# Altium PCB PCB3.PcbDoc
Units mil, origin at the board's own origin, x right, y up, seen from the top; angles counter-clockwise.
Board outline 2952.76 x 2952.76 mil, 4 copper layers (Top Copper, Signal Layer 1, Signal Layer 2, Bottom Copper), stack 61.811 mil thick; 36 components, 31 nets, 190 pads, 97 vias.
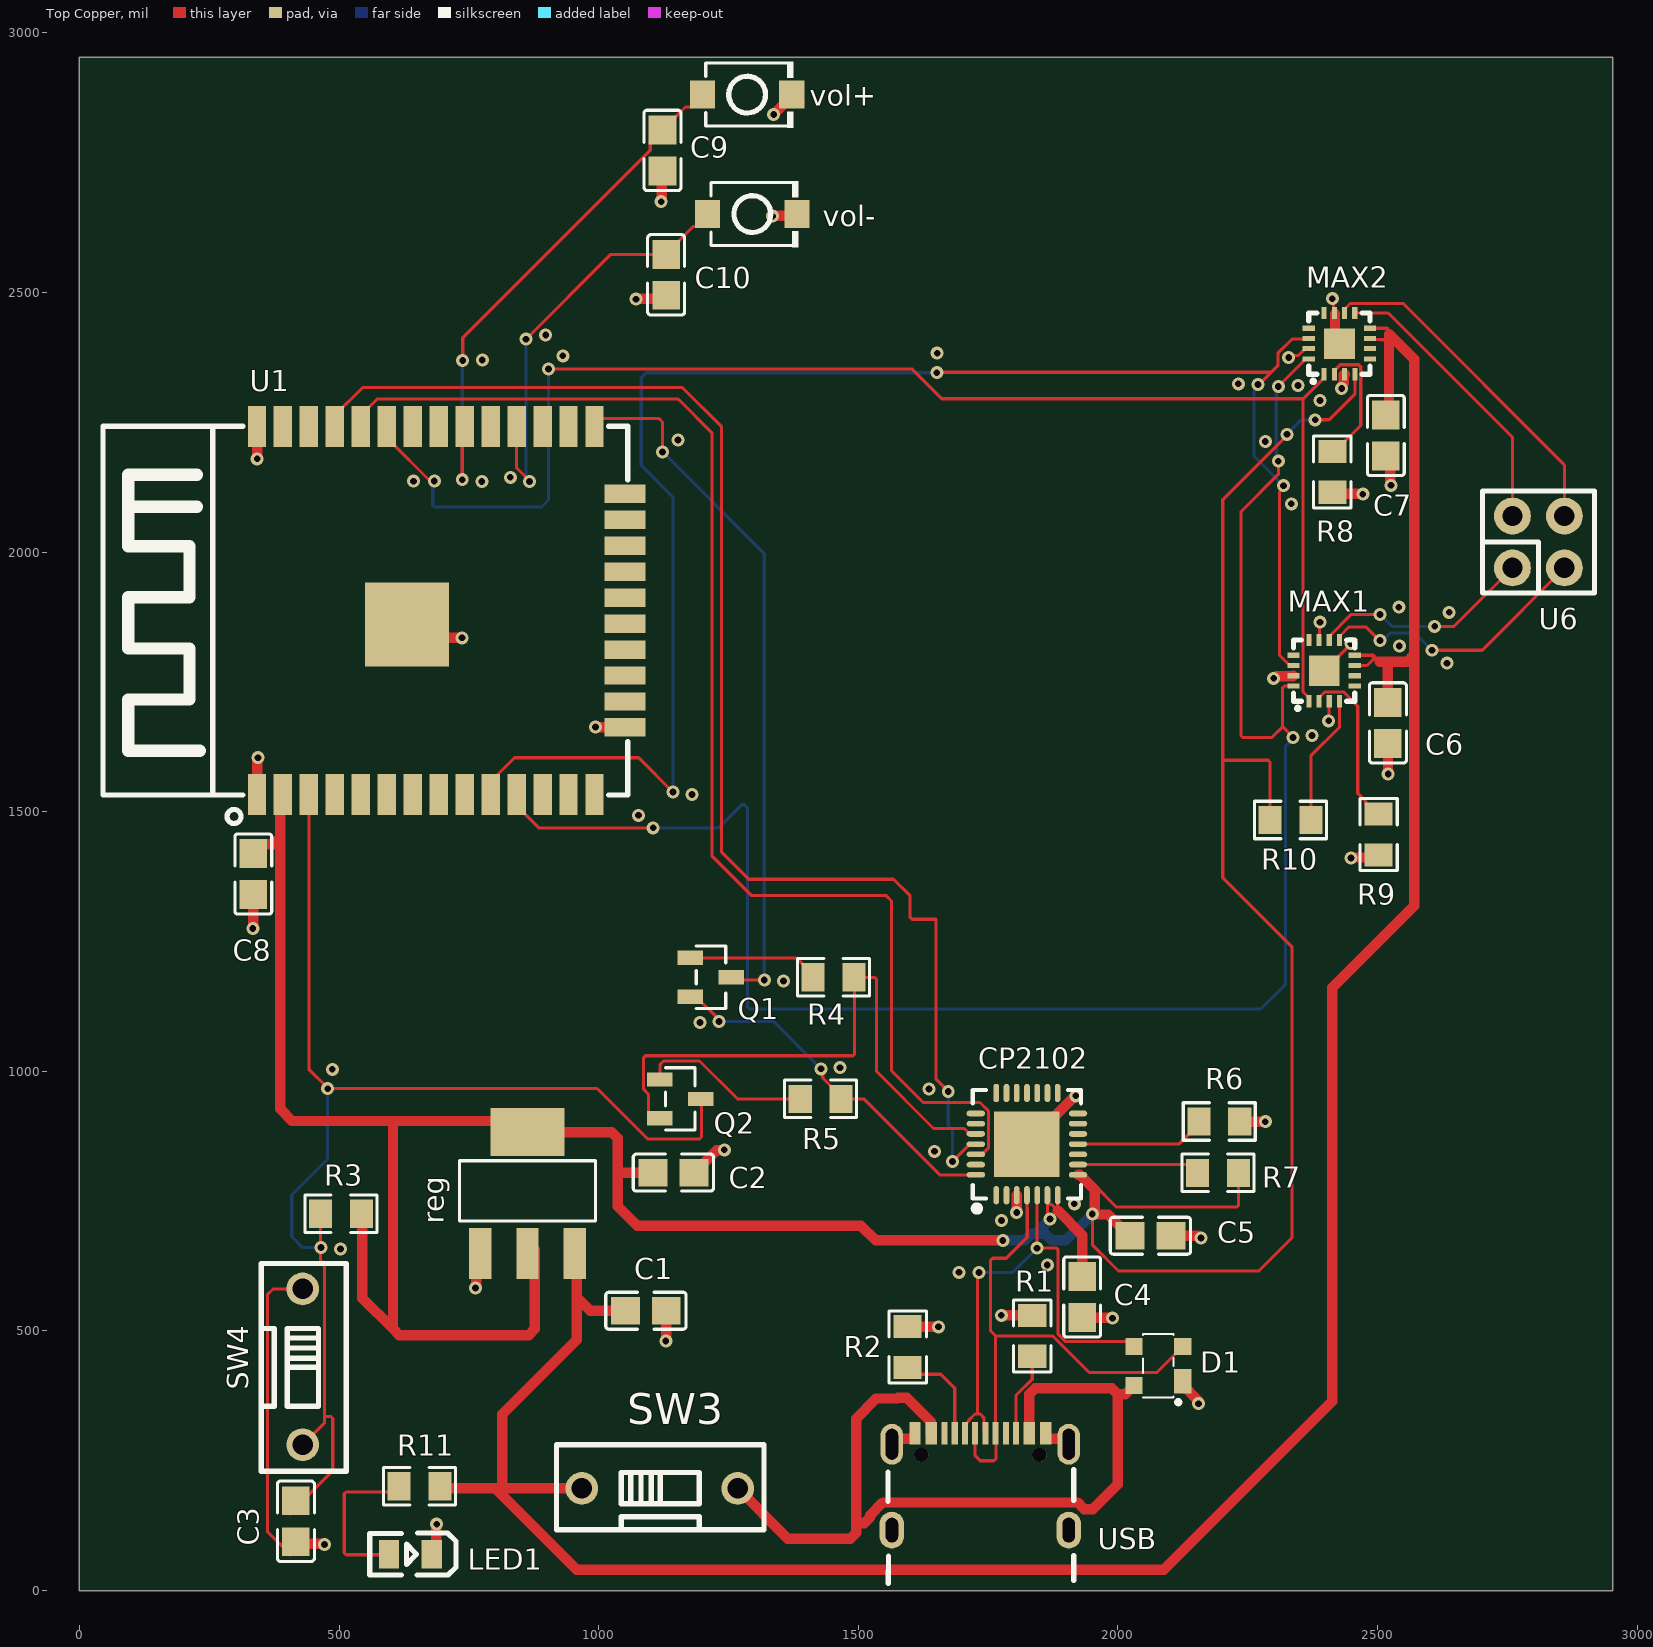
[diagram p0: Top Copper view]
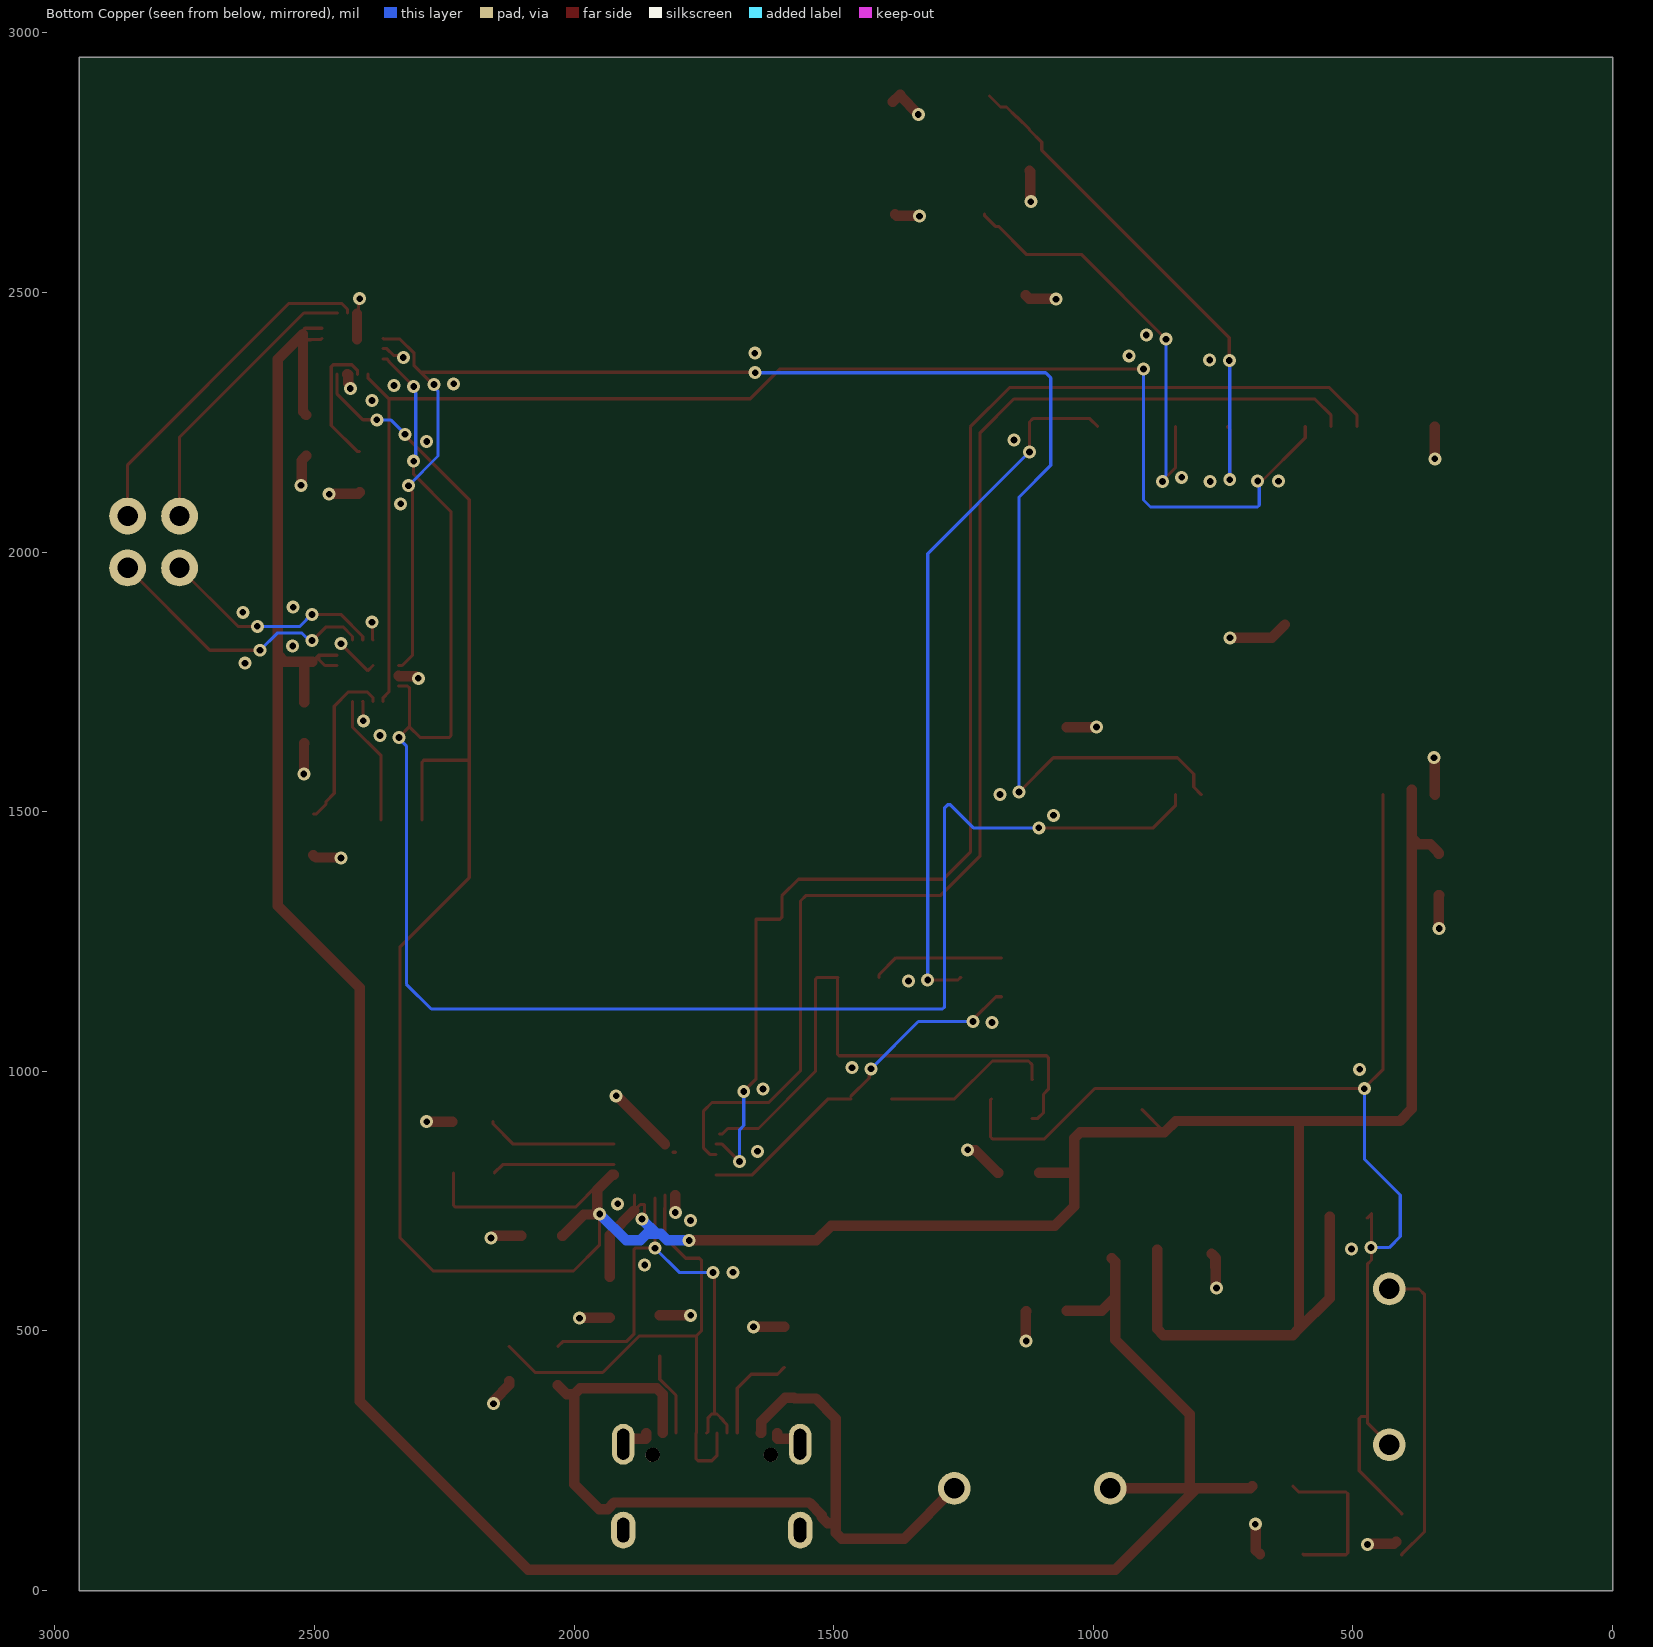
[diagram p1: Bottom Copper view, seen from below]
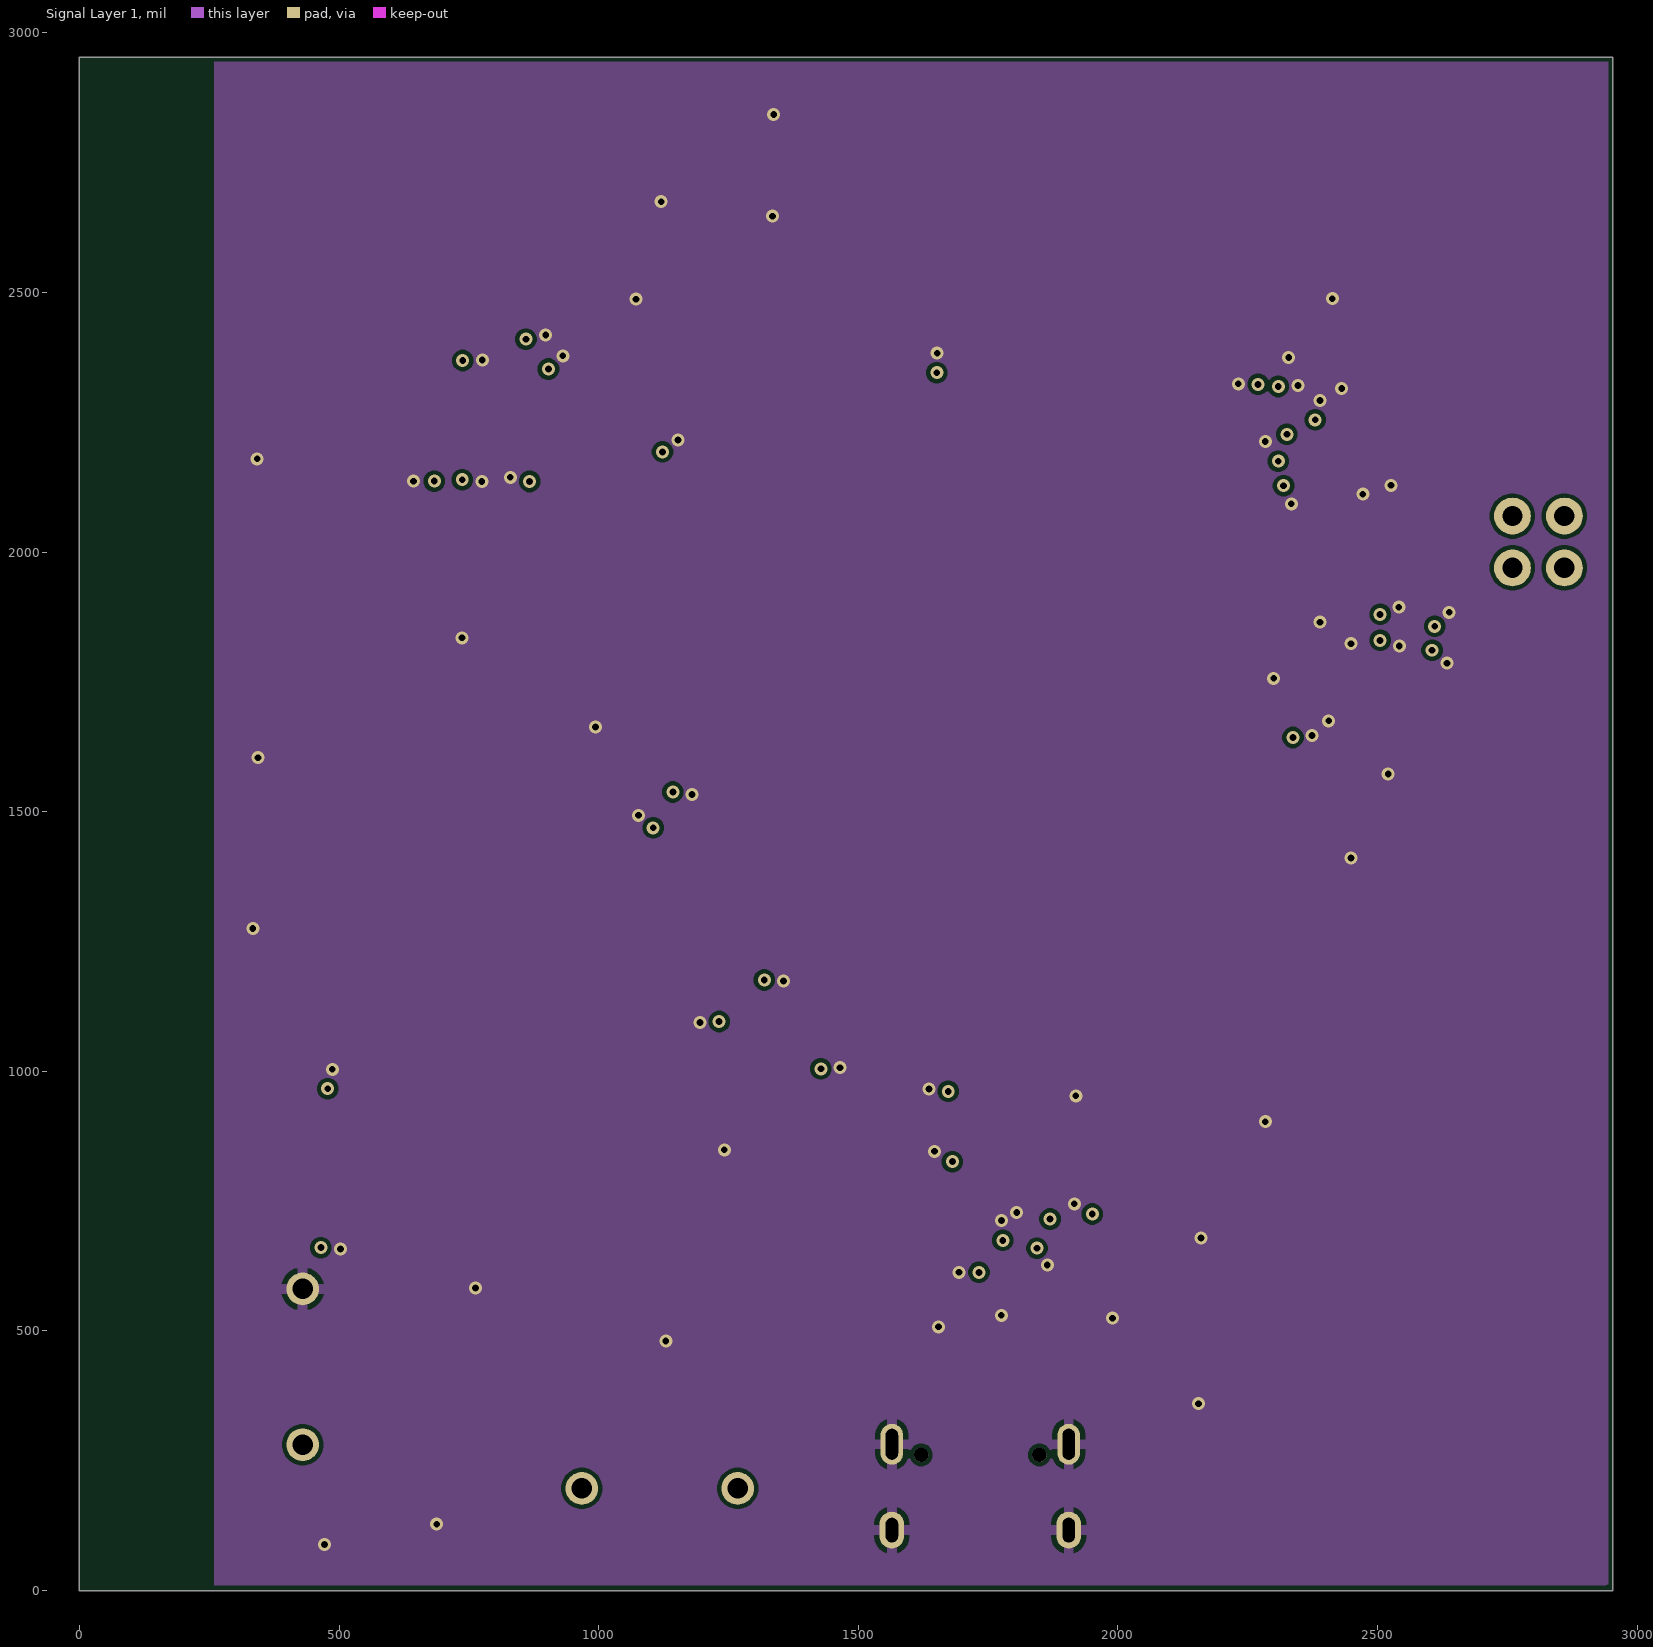
[diagram p2: Signal Layer 1]
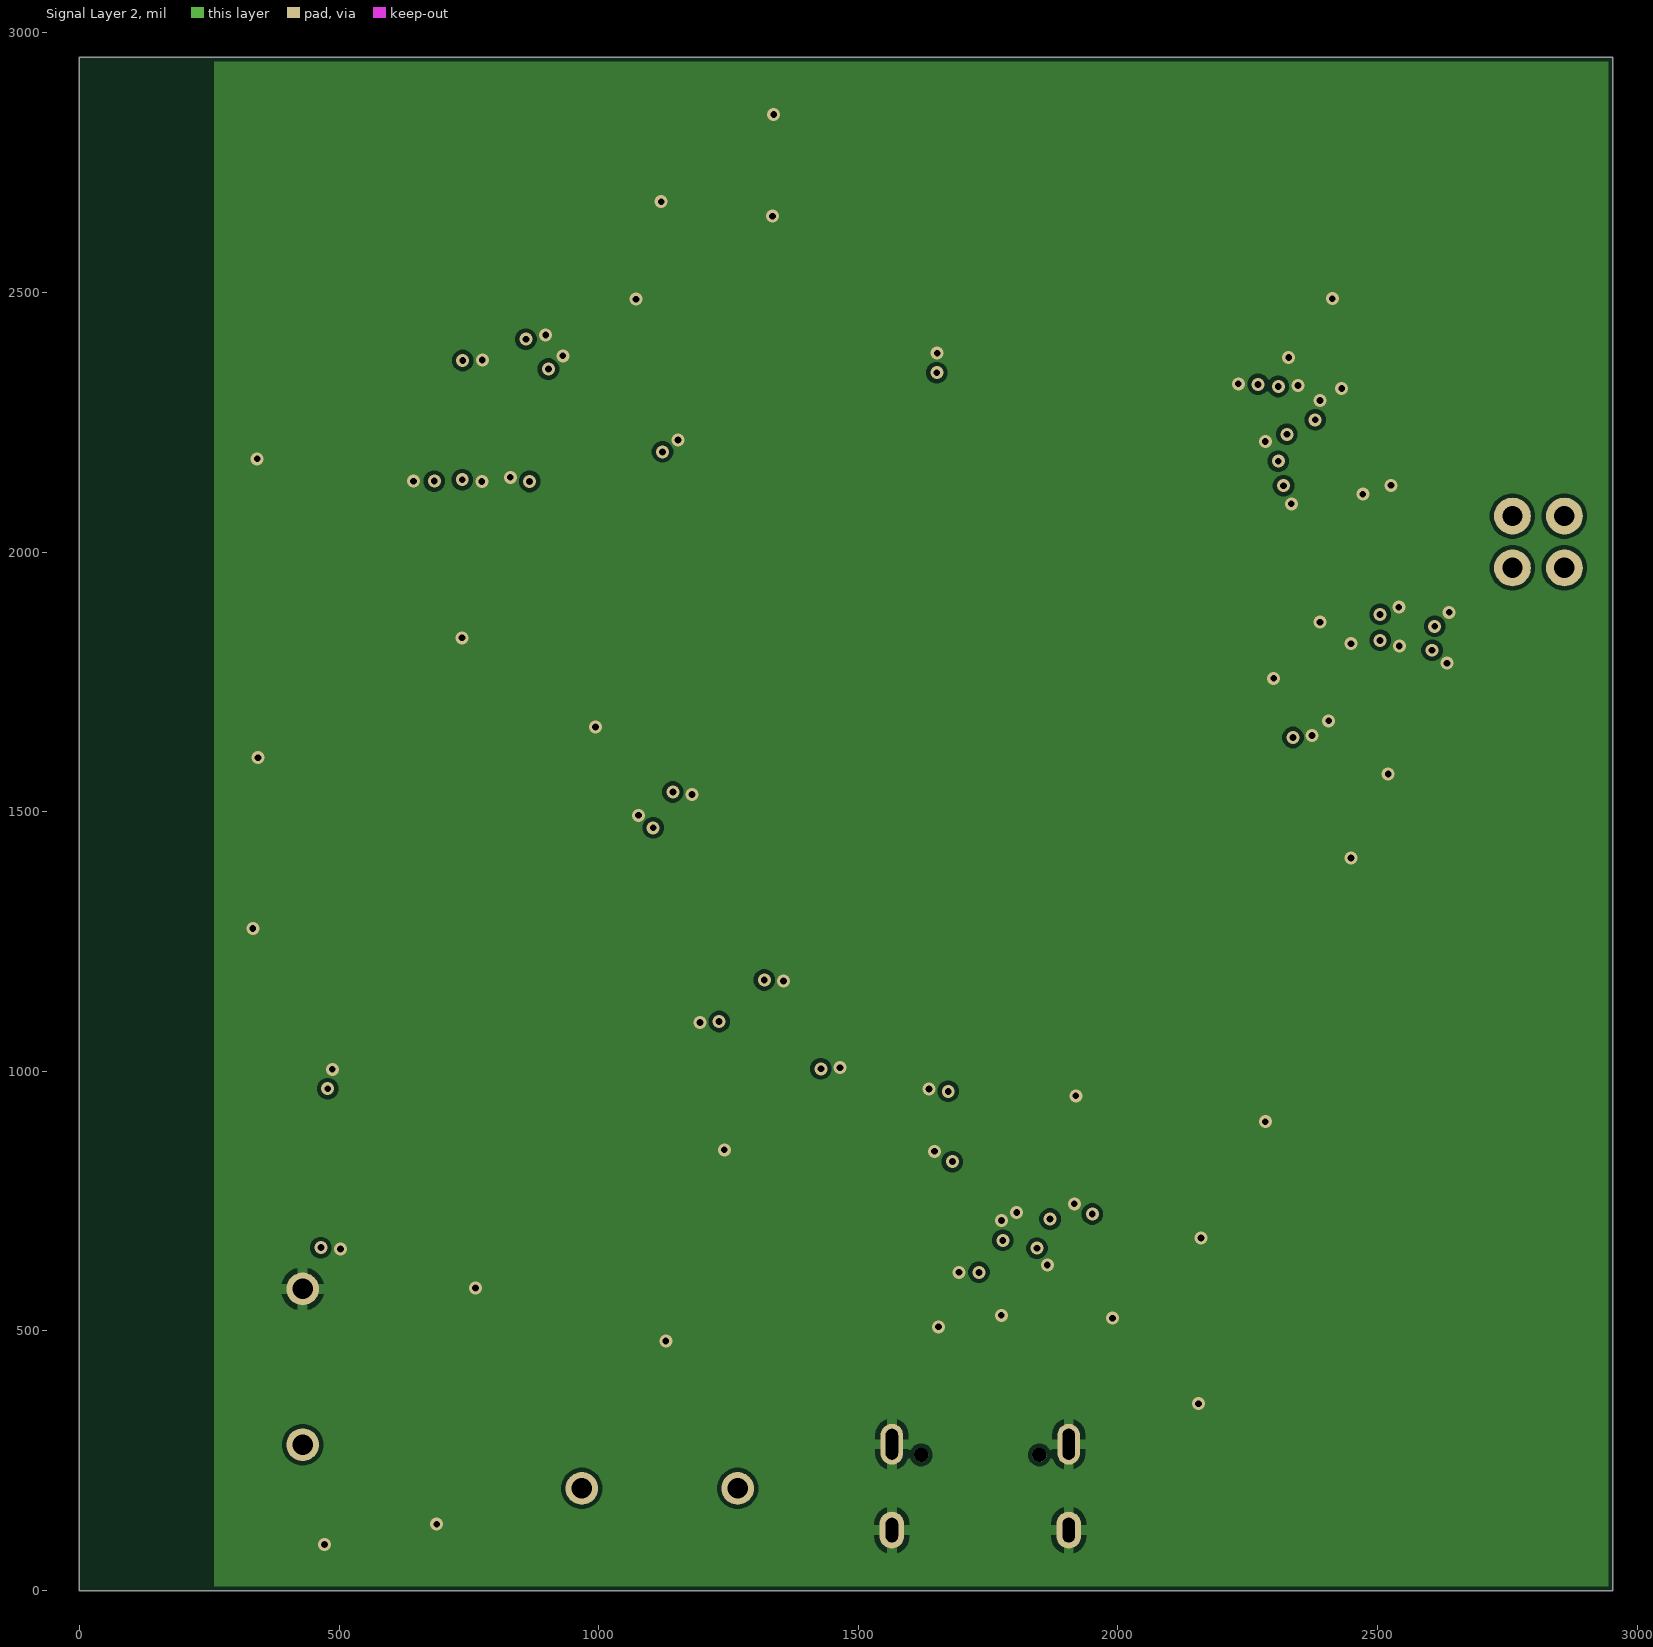
[diagram p3: Signal Layer 2]

## Layer stack, top to bottom
Top Mask: solder mask 0.5906, Solder Resist, Dk 3.8
Top Copper: signal copper 1.378
Dielectric 1: prepreg 7.874, 7628, Dk 4.6
Signal Layer 1: signal copper 0.689
Core: core 41.9291, FR-4, Dk 4.5
Signal Layer 2: signal copper 0.689
Dielectric 2: prepreg 7.874, 7628, Dk 4.6
Bottom Copper: signal copper 1.378
Bottom Mask: solder mask 0.5906, Solder Resist, Dk 3.8

## Board outline
0,0 0,2952.76 2952.76,2952.76 2952.76,0

## Design rules (kind name [scope] priority, off if disabled: settings)
BoardOutlineClearance [All] p1: gap=7.87 ignorepadtopadclearanceinfootprint=FALSE except(15.75: Arc-SplitBarrior Arc-SplitContinuation Track-SplitBarrior Track-SplitContinuation SMDPad-SplitBarrior SMDPad-SplitContinuation THPad-SplitBarrior THPad-SplitContinuation Via-SplitBarrior Via-SplitContinuation Fill-SplitBarrior Fill-SplitContinuation Poly-SplitBarrior Poly-SplitContinuation Region-SplitBarrior Region-SplitContinuation Text-SplitBarrior Text-SplitContinuation)
Clearance "Clearance Bottom Layer" [OnLayer('Bottom Layer')] p1: gap=8 ignorepadtopadclearanceinfootprint=TRUE except(10: Arc-Text Track-Text SMDPad-Text THPad-Text Via-Text Fill-Text Poly-Text Region-Text Text-Text)
Clearance "Clearance Top Layer" [OnLayer('Top Layer')] p2: gap=8 ignorepadtopadclearanceinfootprint=TRUE except(10: Arc-Text Track-Text SMDPad-Text THPad-Text Via-Text Fill-Text Poly-Text Region-Text Text-Text)
Clearance [All] p3: gap=7.87 ignorepadtopadclearanceinfootprint=FALSE except(3.5: Arc-Arc Arc-Track Arc-SMDPad Track-Track Track-SMDPad SMDPad-SMDPad; 5: Arc-Via Track-Via SMDPad-Via THPad-Via Via-Via; 10: Arc-Text Track-Text SMDPad-Text THPad-Text Via-Text Fill-Text Poly-Text Region-Text Text-Text)
HoleSize [All] p1: absolutevalues=TRUE maxlimit=248.03 minlimit=7.87 maxpercent=80.000 minpercent=20.000
MinimumAnnularRing [All] p1: minimumring=3
MinimumSolderMaskSliver [All] p1: minsoldermaskwidth=3.94
PolygonConnect PolygonConnect_1 [All] p1: thpad.connectstyle=Relief thpad.reliefconductorwidth=20 thpad.reliefentries=4 thpad.polygonreliefangle="90 Angle" thpad.airgapwidth=10 smdpad.connectstyle=Relief smdpad.reliefconductorwidth=20 smdpad.reliefentries=4 smdpad.polygonreliefangle="90 Angle" smdpad.airgapwidth=10 via.connectstyle=Direct via.reliefconductorwidth=20 via.reliefentries=4 via.polygonreliefangle="90 Angle" via.airgapwidth=10
RoutingCorners [All] p1: cornerstyle=Round minsetback=100 maxsetback=100
RoutingVias [All] p1: holewidth=19.68 width=39.37 viastyle="Through Hole" minholewidth=7.87 minwidth=17.72 maxholewidth=39.37 maxwidth=78.74
SilkToSilkClearance [All] p1: silktosilkclearance=3.94
SilkToSolderMaskClearance [IsPad] p1: minsilkscreentomaskgap=3.94 clearancetoexposedcopper=TRUE
SolderMaskExpansion [All] p1: expansion=4 istentingtop=FALSE
Width [All] p1: maxlimit=100 minlimit=6 preferedwidth=20
25 further rules are at their usual default settings.

## Components (designator, comment, footprint, x,y, rotation, side; value= is the part's Value field where it differs from the comment)
C1 "22uF" C0805 1091,539 r0 top
C2 "22uF" C0805 1144,805 r0 top
C3 "1uF" C0805 417,133.63 r90 top
C4 "22uF" C0805 1931.28,565.45 r270 top
C5 "22uF" C0805 2062.65,683.45 r180 top
C6 "22uF" C0805 2520,1671 r90 top
C7 "22uF" C0805 2516,2224.63 r270 top
C8 "22uF" C0805 335,1380 r270 top
C9 "1uF" C0805 1123,2773.63 r270 top
C10 "1uF" C0805 1130,2534 r270 top
CP2102 "CP2102-GMR" WQFN-28_L5.0-W5.0-P0.50-BL-EP3.2 1824.86,859.85 r0 top
D1 "TPSP0503BAHTG" SOT-143-4_L2.9-W1.3-P1.92-LS2.4-BL 2078.1,432.6 r90 top
LED1 "0805G (Green)" LED0805-R-RD 637.65,70 r180 top
MAX1 "MAX98357AETE+T" TQFN-16_L3.0-W3.0-P0.50-BL-EP1.5 2397.2,1771.65 r0 top
MAX2 "MAX98357AETE+T" TQFN-16_L3.0-W3.0-P0.50-BL-EP1.5 2426.68,2401.57 r0 top
Q1 "SS8050_C2150" SOT-23-3_L2.9-W1.3-P1.90-LS2.4-BR 1216.1,1181.1 r180 top
Q2 "SS8050_C2150" SOT-23-3_L2.9-W1.3-P1.90-LS2.4-BR 1157.05,946.85 r180 top
R1 "4.7kΩ" R0805 1835,490.63 r90 top
R2 "4.7kΩ" R0805 1595,469.37 r90 top
R3 "10kΩ" R0805 503.61,725.76 r0 top
R4 "10kΩ" R0805 1452.32,1181.1 r0 top
R5 "10kΩ" R0805 1427.63,947 r0 top
R6 "10kΩ" R0805 2195.28,903.45 r0 top
R7 "10kΩ" R0805 2192.91,804.45 r0 top
R8 "100kΩ" R0805 2413,2154.63 r90 top
R9 "100kΩ" R0805 2502,1456 r90 top
R10 "200kΩ" R0805 2332.37,1484 r0 top
R11 "2kΩ" R0805 655,201 r0 top
reg "AMS1117-3.3" SOT-223-3_L6.5-W3.4-P2.30-LS7.0-BR 863,766 r270 top (schematic designator U5)
SW3 "DSWB01LHGET" SW-TH_DSWB01LHGET 1117.68,196.85 r90 top
SW4 "DSWB01LHGET" SW-TH_DSWB01LHGET 430,431 r0 top
U1 "ESP32-WROOM-32" WIFIM-SMD_ESP32-WROOM-32-N4 696.53,1887.33 r90 top
U6 "2.54-2*2" HDR-TH_4P-P2.54-V-F-R2-C2-S2.54 2809.91,2019.5 r0 top
USB "TYPE-C 16PIN 2MD(073)" USB-C-SMD_TYPE-C-6PIN-2MD-073 1735,210 r0 top
vol+ "TS-1088-AR02016" SW-SMD_L3.9-W3.0-P4.45 1286,2881 r0 top (schematic designator SW1)
vol- "TS-1088-AR02016" SW-SMD_L3.9-W3.0-P4.45 1296,2651 r0 top (schematic designator SW2)

## Footprints (in the part's own frame and the unit in brackets; to place one, negate y for a bottom-side part, rotate by r counter-clockwise, add the part's x,y. Pads: shape width x height; smd on the part's side, far side on the other; paste and mask are expansions set on the pad)
C0805 [mm]
  rect 1.41x1.35 smd paste-100 mask+0.051: 1(-1,0) 2(1,0)
  silkscreen extent -1.96,-0.9 1.96,0.9
HDR-TH_4P-P2.54-V-F-R2-C2-S2.54 [mm]
  round 1.8 hole 1 paste-2539.97 mask+0.051: 1(-1.27,-1.27) 2(-1.27,1.27) 3(1.27,-1.27) 4(1.27,1.27)
  silkscreen extent -2.74,-2.5 2.74,2.5
LED0805-R-RD [mm]
  rect 1x1.4 smd paste+0 mask+0.051: 1(1.05,0) 2(-1.05,0)
  silkscreen extent -2.22,-1.04 1.99,1.01
R0805 [mil]
  rect 44.59x54.21 smd paste-3937.01 mask+2: 1(-39.37,0) 2(39.37,0)
  silkscreen extent -69,-36 69,36
SOT-23-3_L2.9-W1.3-P1.90-LS2.4-BR [mm]
  rect 1.25x0.7 smd paste+0 mask+0.051: 1(1,-0.95) 2(1,0.95) 3(-1,0)
  silkscreen extent -0.73,-1.53 0.73,1.53
SOT-143-4_L2.9-W1.3-P1.92-LS2.4-BL [mil]
  rect 47x33 smd paste+0 mask+2: 1(-29.53,-46.9)
  rect 33x33 smd paste+0 mask+2: 2(37.4,-46.9) 3(37.4,46.91) 4(-37.4,46.91)
  silkscreen extent -74,-42 61,30
SOT-223-3_L6.5-W3.4-P2.30-LS7.0-BR [mm]
  rect 2.5x1.1 smd paste+0 mask+0.051: 1(2.97,-2.3) 2(2.97,0) 3(2.97,2.3)
  rect 2.34x3.6 smd paste+0 mask+0.051: 4(-2.97,0)
  silkscreen extent -1.57,-3.33 1.37,3.33
SW-SMD_L3.9-W3.0-P4.45 [mm]
  rect 1.23x1.36 smd paste+0 mask+0.051: 1(-2.185,0) 2(2.185,0)
  silkscreen extent -2.03,-1.62 2.25,1.62
SW-TH_DSWB01LHGET [mm]
  round 1.6 hole 1 paste-2539.97 mask+0.051: 1(0,3.81) 2(0,-3.81)
  silkscreen extent -2.02,-5.11 2.13,5.05
TQFN-16_L3.0-W3.0-P0.50-BL-EP1.5 [mm]
  rect 0.25x0.6 smd paste-100 mask+0.051: 1(-0.749,-1.5) 2(-0.248,-1.5) 3(0.251,-1.5) 4(0.752,-1.5) 9(0.75,1.5) 10(0.25,1.5) 11(-0.25,1.5) 12(-0.749,1.5)
  rect 0.6x0.25 smd paste-100 mask+0.051: 5(1.5,-0.748) 6(1.5,-0.248) 7(1.5,0.252) 8(1.5,0.752) 13(-1.5,0.752) 14(-1.5,0.252) 15(-1.5,-0.248) 16(-1.5,-0.748)
  rect 1.5x1.5 smd paste-100 mask+0.051: 17(0,0)
  silkscreen extent -1.5,-1.9 1.5,1.5
USB-C-SMD_TYPE-C-6PIN-2MD-073 [mm]
  rect 0.55x1.1 smd paste-100 mask+0.05: 1(-3.2,2.375) 2(-2.4,2.375) 11(2.4,2.375) 12(3.2,2.375)
  rect 0.3x1.1 smd paste-100 mask+0.05: 3(-1.75,2.375) 4(-1.25,2.375) 5(-0.75,2.375) 6(-0.25,2.375) 7(0.25,2.375) 8(0.75,2.375) 9(1.25,2.375) 10(1.75,2.375)
  oval 1.2x1.8 hole 0.6 slot 1.2 at 90 deg paste-2539.97 mask+0.05: 13(-4.325,-2.375) 14(4.325,-2.375)
  oval 1.1x2 hole 0.6 slot 1.5 at 90 deg paste-2539.97 mask+0.05: 13(-4.325,1.825) 14(4.325,1.825)
  round 0.7 hole 0.7 unplated paste-2539.97: ""(-2.89,1.305) ""(2.89,1.305)
  silkscreen extent -4.52,-4.97 4.57,0.6
WIFIM-SMD_ESP32-WROOM-32-N4 [mm]
  rect 2x0.9 smd paste+0 mask+0.05: 1(-9,9.005) 2(-9,7.735) 3(-9,6.465) 4(-9,5.195) 5(-9,3.925) 6(-9,2.655) 7(-9,1.385) 8(-9,0.115) 9(-9,-1.155) 10(-9,-2.425) 11(-9,-3.695) 12(-9,-4.965) 13(-9,-6.235) 14(-9,-7.505) 25(9,-7.505) 26(9,-6.235) 27(9,-4.965) 28(9,-3.695) 29(9,-2.425) 30(9,-1.155) 31(9,0.115) 32(9,1.385) 33(9,2.655) 34(9,3.925) 35(9,5.195) 36(9,6.465) 37(9,7.735) 38(9,9.005)
  rect 0.9x2 smd paste+0 mask+0.05: 15(-5.715,-9.005) 16(-4.445,-9.005) 17(-3.175,-9.005) 18(-1.905,-9.005) 19(-0.635,-9.005) 20(0.635,-9.005) 21(1.905,-9.005) 22(3.175,-9.005) 23(4.445,-9.005) 24(5.715,-9.005)
  rect 4.1x4.1 smd paste+0 mask+0.05: 39(-0.68,1.665)
  silkscreen extent -10.41,-9.13 9.02,16.54
WQFN-28_L5.0-W5.0-P0.50-BL-EP3.2 [mm]
  oval 0.28x0.9 smd paste-100 mask+0.051: 1(-1.501,-2.5) 2(-1.001,-2.5) 3(-0.501,-2.5) 4(0,-2.5) 5(0.5,-2.5) 6(1.001,-2.5) 7(1.501,-2.5) 15(1.501,2.5) 16(1.001,2.5) 17(0.5,2.5) 18(0,2.5) 19(-0.501,2.5) 20(-1.001,2.5) 21(-1.501,2.5)
  oval 0.9x0.28 smd paste-100 mask+0.051: 8(2.5,-1.501) 9(2.5,-1.001) 10(2.5,-0.5) 11(2.5,0) 12(2.5,0.5) 13(2.5,1.001) 14(2.5,1.501) 22(-2.5,1.501) 23(-2.5,1.001) 24(-2.5,0.5) 25(-2.5,0) 26(-2.5,-0.5) 27(-2.5,-1.001) 28(-2.5,-1.501)
  rect 3.2x3.2 smd paste-100 mask+0.051: 29(0,0)
  silkscreen extent -2.65,-3.3 2.65,2.65

## Part data
C1 C2 C4 C5 C6 C7 C8: JLCPCB Part Class="Basic Part", Manufacturer=SAMSUNG(三星), Manufacturer Part=CL21A226MAQNNNE, nameAlias=Value, spicePre=C, spiceSymbolName=CL21A226MAQNNNE, Supplier=LCSC, Supplier Part=C45783
C3 C9 C10: JLCPCB Part Class="Basic Part", Manufacturer=SAMSUNG(三星), Manufacturer Part=CL21B105KBFNNNE, nameAlias=Value, spicePre=C, spiceSymbolName=CL21B105KBFNNNE, Supplier=LCSC, Supplier Part=C28323
CP2102: JLCPCB Part Class="Extended Part", Manufacturer="SKYWORKS/SILICON LABS(芯科)", Manufacturer Part=CP2102-GMR, spicePre=U, spiceSymbolName=CP2102-GMR, Supplier=LCSC, Supplier Part=C6568
D1: JLCPCB Part Class="Extended Part", Manufacturer="TECH PUBLIC(台舟)", Contributor=LCSC, Manufacturer Part=TPSP0503BAHTG, spicePre=D, spiceSymbolName=TPSP0503BAHTG, Supplier=LCSC, Supplier Part=C2682275
LED1: JLCPCB Part Class="Basic Part", Manufacturer=KENTO, Manufacturer Part=KT-0805翠绿, spicePre=L, spiceSymbolName="0805G (Green)", Supplier=LCSC, Supplier Part=C2297
MAX1 MAX2: JLCPCB Part Class="Extended Part", Manufacturer=ADI(亚德诺)/MAXIM(美信), Contributor=LCSC, Manufacturer Part=MAX98357AETE+T, spicePre=U, spiceSymbolName=MAX98357AETE+T, Supplier=LCSC, Supplier Part=C910544
Q1 Q2: JLCPCB Part Class="Basic Part", Manufacturer=CJ(江苏长电/长晶), Manufacturer Part=SS8050, spicePre=Q, spiceSymbolName=SS8050_C2150, Supplier=LCSC, Supplier Part=C2150
R1 R2: JLCPCB Part Class="Basic Part", Manufacturer=UNI-ROYAL(厚声), Manufacturer Part=0805W8F4701T5E, nameAlias=Value, spicePre=R, spiceSymbolName=0805W8F4701T5E, Supplier=LCSC, Supplier Part=C17673
R3 R4 R5 R6 R7: JLCPCB Part Class="Basic Part", Manufacturer=UNI-ROYAL(厚声), Manufacturer Part=0805W8F1002T5E, nameAlias=Value, spicePre=R, spiceSymbolName=0805W8F1002T5E, Supplier=LCSC, Supplier Part=C17414
R8 R9: JLCPCB Part Class="Extended Part", Manufacturer=FOJAN(富捷), Manufacturer Part="FRC0805J104 TS", Contributor=lcsc, nameAlias=Value, spicePre=R, spiceSymbolName="FRC0805J104 TS", Supplier=LCSC, Supplier Part=C2907293
R10: JLCPCB Part Class="Basic Part", Manufacturer=UNI-ROYAL(厚声), Manufacturer Part=0805W8F2003T5E, nameAlias=Value, spicePre=R, spiceSymbolName=0805W8F2003T5E, Supplier=LCSC, Supplier Part=C17539
R11: JLCPCB Part Class="Basic Part", Manufacturer=UNI-ROYAL(厚声), Manufacturer Part=0805W8F2001T5E, nameAlias=Value, spicePre=R, spiceSymbolName=0805W8F2001T5E, Supplier=LCSC, Supplier Part=C17604
reg: JLCPCB Part Class="Basic Part", Manufacturer=AMS, Manufacturer Part=AMS1117-3.3, sourceId=dwIGgezVh, spicePre=U, spiceSymbolName=AMS1117-3.3, Supplier=LCSC, Supplier Part=C6186, timeStamp=1476261164
SW3 SW4: JLCPCB Part Class="Extended Part", Manufacturer=YE, Manufacturer Part=DSWB01LHGET, spicePre=S, spiceSymbolName=DSWB01LHGET, Supplier=LCSC, Supplier Part=C126888
U1: JLCPCB Part Class="Extended Part", Manufacturer=ESPRESSIF(乐鑫), Manufacturer Part=ESP32-WROOM-32-N4, Contributor=LCSC, spicePre=U, spiceSymbolName=ESP32-WROOM-32, Supplier=LCSC, Supplier Part=C82899
U6: JLCPCB Part Class="Extended Part", Manufacturer=ZHOURI(洲日), Contributor=LCSC, Manufacturer Part=2.54-2*2, spicePre=U, spiceSymbolName=2.54-2*2, Supplier=LCSC, Supplier Part=C2977590
USB: JLCPCB Part Class="Extended Part", Manufacturer="SHOU HAN(首韩)", Contributor=LCSC, Manufacturer Part="TYPE-C 16PIN 2MD(073)", spicePre=U, spiceSymbolName="TYPE-C 16PIN 2MD(073)", Supplier=LCSC, Supplier Part=C2765186
vol+ vol-: JLCPCB Part Class="Extended Part", Manufacturer=XUNPU(讯普), Contributor=LCSC, Manufacturer Part=TS-1088-AR02016, spicePre=S, spiceSymbolName=TS-1088-AR02016, Supplier=LCSC, Supplier Part=C720477

## Via types
v1: diameter 25, hole 13, Top Copper to Bottom Copper, 97 vias

## Nets (pads, with @x,y where several pads share a name; then routed paths per layer and width w, separated by ;. In a path a pad name is that pad's centre, name@x,y a point inside that pad or via, vN(x,y) a via of type N, cw(c..) or ccw(c..) an arc to the next point about the centre after c; other vN are vias at no path point)
GND: C1.2 C2.2 C3.1 C4.2 C5.1 C6.1 C7.2 C8.2 C9.2 C10.2 CP2102.3 CP2102.29 D1.1 LED1.2 MAX1.3 MAX1.11 MAX1.15 MAX1.17 MAX2.3 MAX2.11 MAX2.15 MAX2.17 R1.2 R2.2 R6.2 R8.1 R9.1 reg.1 SW4.1 U1.1 U1.15 U1.38 U1.39 USB.1 USB.12 USB.13 USB.14 vol+.2 vol-.2 | length 2801.8
  Top Copper w6: C8.2@334.1,1339.72 C8.2 ; C3.1@406,68.63 406,69.81 362,113.81 362,570 373,581 SW4.1 ; LED1.2 LED1.2@683.33,65.67 ; reg.1@772.45,621.51 reg.1 ; C1.2@1129.38,538.01 C1.2 ; CP2102.29@1805.15,844.15 CP2102.29@1809.15,844.15 ; C5.1 C5.1@2102.34,683.13 ; v1(2300,1757) v1@2302.97,1759.97 ; v1(2329,2375) 2332.64,2378.64 2347.56,2378.64 2360.74,2391.81 MAX2.15 ; MAX1.17@2387.36,1781.49 MAX1.17 2449.16,1823.6 v1(2449.16,1823.69) v1@2448.69,1823.69 ; MAX1.11 2388.18,1831.52 2388.18,1864.18 v1(2389,1865) ; v1(2406,1675) 2406.55,1675.55 2406.55,1712.05 MAX1.3 ; v1(2413,2488) 2414.92,2486.08 2414.92,2462.54 MAX2.11 MAX2.11@2418.09,2459.36 ; v1(2525.78,2128.68) v1@2525.78,2133.82
  Top Copper w20: v1(334.1,1275.12) 334.55,1275.58 334.55,1339.27 C8.2@334.1,1339.72 ; U1.1 342.29,1533.29 342.29,1600.94 344,1602.65 v1(344,1604) ; U1.38 342.19,2241.48 342.19,2179.75 v1(342.37,2179.56) ; C3.1 421.3,89.96 471.04,89.96 v1(472,89) ; U1.39 656.54,1835 v1(737,1835) ; LED1.2 687.04,78.04 687.04,127.04 v1(688,128) ; v1(763,583) 763.96,583.96 763.96,640.58 reg.1 ; v1(993.8,1663.42) 994.35,1662.88 1050.52,1662.88 U1.15 ; v1(1072.12,2487.09) 1073.08,2488.05 1123.42,2488.05 C10.2 ; v1(1120.5,2674.87) 1121.46,2675.83 1121.46,2732.72 C9.2 ; v1(1129.38,480.55) 1129.88,481.04 1129.88,537.52 C1.2@1129.38,538.01 ; C2.2 1184.55,805 1227.55,848 1241.13,848 v1(1242.08,848.96) ; v1(1334.88,2647.03) 1335.83,2647.99 1379.01,2647.99 vol-.2 ; v1(1337,2843) 1337,2843.42 1372.02,2878.44 vol+.2 vol+.2@1386.04,2866.98 ; USB.13@1564.73,281.85 1564.73,281.91 1575.49,292.68 1608.19,292.68 1609.02,293.51 USB.1 ; R2.2 1595.39,508.35 1654.15,508.35 v1(1654.54,507.96) ; v1(1775.5,530.13) 1775.57,530.07 1834.93,530.07 R1.2 ; v1(1805,728) 1805.08,728.08 1805.08,761.36 CP2102.3 ; CP2102.29 1918,953 v1(1919,953) ; USB.12 1860.99,293.5 1861.81,292.68 1894.51,292.68 1905.28,281.91 USB.14@1905.28,281.85 ; C4.2 1932.02,525.34 1989.04,525.34 v1(1989.78,524.59) ; C5.1 2154.2,683.45 2158.65,679 v1(2160,679) ; D1.1 2125,396.07 2154.04,367.02 2154.04,360.96 v1(2155,360) ; R6.2 2234.88,903.23 2283.78,903.23 v1(2284,903) ; v1(2300,1757) 2301.35,1757 2304.98,1760.63 2336.89,1760.63 MAX1.15 ; R8.1 2415.74,2112.51 2470.77,2112.51 v1(2471.73,2111.55) ; MAX2.17@2418.09,2410.15 MAX2.11@2418.09,2459.36 ; v1(2431,2315) 2431.96,2315.96 2431.96,2321.76 2435.32,2325.12 2435.32,2341.26 MAX2.3 ; v1(2448.79,1410.81) 2449.75,1411.76 2497.14,1411.76 R9.1 ; C7.2 2524.83,2176.43 2524.83,2129.64 v1(2525.78,2128.68) ; C6.1 2520.23,1631.4 2520.23,1573.11 v1(2520.45,1572.88)
  other v1: 1694,613 1864,627 503,658 1776,713 1916,745 1647,846 1636,966 487,1004 1465,1007 1195,1094 1356,1174 1077,1493 1180,1533 2374,1647 2634,1786 2542,1819 2638,1884 2541,1894 2334,2093 775,2136 643.35,2136.59 830,2144 2284,2213 1153,2216 2389,2292 2347,2321 2232,2324 776,2370 931,2378 1652,2383 898,2418
NetC1_1: C1.1 C6.2 C7.1 MAX1.7 MAX1.8 MAX2.7 MAX2.8 R11.2 reg.3 SW3.1 | length 5318.9
  Top Copper w6: MAX1.7 2480.05,1781.57 2491.74,1793.26 2491.74,1801.26 ; MAX1.8 2491.74,1801.26 ; MAX2.7 2487.66,2409.57 2506.55,2409.57 2507.11,2409 2518.49,2409 2522,2412.51 ; MAX2.8 2518.49,2431.18 2522,2427.67 2522,2420.09 ; 2504,1789 2491.74,1801.26
  Top Copper w20: R11.2 698.18,197.19 800.81,197.19 958,40 2088,40 2413,365 2413,1161 2571,1319 2571,1803 ; 814.53,196.85 SW3.1 ; 814.53,197.19 814.53,339.53 957.67,482.67 957.67,565 ; reg.3@964.55,640.07 957.67,633.19 957.67,565 ; C1.1 983.67,539 957.67,565 ; 2504,1789 2520,1789 ; C7.1 2522,2270 2522,2412.51 2522,2420.09 2571,2371.09 2571,1803 ; C6.2 2520,1789 ; 2520,1789 2557,1789 2571,1803
NetC2_1: C2.1 C4.1 C5.2 C8.1 CP2102.6 CP2102.7 CP2102.8 MAX2.4 R3.2 R7.2 R10.1 reg.2 reg.4 U1.2 | length 7012
  Top Copper w6: reg.4 reg.4@906.06,925.99 ; v1@1864.25,725.85 1864.25,743.64 1872.41,743.64 1883.95,732.11 CP2102.7 ; v1(1950.75,725.25) 1950.75,665.98 2001.28,615.45 2271.28,615.45 2335,679.17 2335,1240 2202,1373 2202,1599.05 ; 1955.28,780.45 1997.28,738.45 2228.77,738.45 2232.28,741.96 R7.2 ; R10.1 2293,1595.54 2289.49,1599.05 2202,1599.05 ; v1@2330,2229 2202,2101 2202,1599.05 ; v1(2379.96,2254.85) 2406.85,2254.85 2456.26,2304.26 MAX2.4
  Top Copper w20: C8.1 335,1420.55 351.57,1437.13 373.85,1437.13 386.72,1450 ; U1.2@386.72,1542.52 386.72,1450 ; R3.2@545,720 545,562.84 604,503.84 ; reg.2@877,656.98 877,503.84 865.28,492.13 615.72,492.13 604,503.84 ; C2.1 1037.5,805 1037,805.5 ; v1(1778.28,674.45) 1533.55,674.45 1505,703 1074,703 1037,740 1037,805.5 ; 1883.95,732.11 1931.28,684.77 C4.1 ; CP2102.8 1926.51,800.75 1955.28,771.98 v1@1955.28,727.45 ; v1(1950.75,725.25) 1951.71,724.29 1981.26,724.29 2022.1,683.45 C5.2 ; 386.72,1450 386.72,927.81 410.2,904.33 604,904.33 ; 604,503.84 604,904.33 ; 604,904.33 841.6,904.33 reg.4 1025.07,882.93 1037,871 1037,805.5
  Bottom Copper w6: v1(2325.47,2226.8) 2353.32,2254.64 2379.75,2254.64 v1(2379.96,2254.85)
  Bottom Copper w20: v1(1778.28,674.45) 1778.87,675.04 1820.78,675.04 1832.79,687.06 1860.07,687.06 1872.68,674.45 1899.96,674.45 v1(1950.75,725.25) ; 1840.88,687.06 v1(1869.39,715.57)
NetC3_2: C3.2 Q2.3 R3.1 SW4.2 U1.3 | length 2507
  Top Copper w6: C3.2@406,147.37 406,148.55 488,230.55 488,331.49 484.49,335 472.37,335 ; SW4.2 472.37,323.37 472.37,335 ; U1.3 442,1004 479,967 997,967 1094,870 1194.49,870 1198,873.51 1198,945.26 Q2.3 ; R3.1@472.73,717.27 R3.1 464.24,636.61 472.37,628.49 472.37,335
  Bottom Copper w6: v1(465.1,660.58) 430.42,660.58 409,682 409,762 478.14,831.14 v1(478.14,966.55)
NetC9_1: C9.1 U1.30 vol+.1 | length 1042.4
  Top Copper w6: v1(737.32,2139.38) 737.32,2236.99 U1.30 ; v1(738.26,2368.99) 738.26,2413.04 1099.42,2774.21 1099.42,2789.43 C9.1 1123,2814.18 1146.58,2837.76 1147.76,2837.76 1167.23,2857.23 1178.76,2857.23 vol+.1@1199.98,2878.44
  Bottom Copper w6: v1(737.32,2139.38) 737.32,2368.05 v1(738.26,2368.99)
NetC10_1: C10.1 U1.28 vol-.1 | length 849.5
  Top Copper w6: U1.28 842,2162 v1@871,2133 ; v1(860,2410) 1023.37,2573.37 C10.1 1130,2574.55 1182.68,2627.23 1188.76,2627.23 1209.98,2648.44 vol-.1
  Bottom Copper w6: v1(860,2410) 860,2148.26 867.04,2141.22 v1(867.04,2136.08)
NetCP2102_4: CP2102.4 D1.2 USB.6 USB.8 | length 1056.5
  Top Copper w6: USB.6 1725.16,259.84 1735,250 1761.49,250 1765,253.51 1765,303.04 USB.8 1764.53,490.47 ; CP2102.4 1824.85,737.14 1825.5,736.49 1825.5,680.5 1785,640 1758.51,640 1755,636.49 1755,500 1764.53,490.47 ; D1.2 2075,420 1945,420 1874.53,490.47 1764.53,490.47
NetCP2102_5: CP2102.5 D1.3 USB.5 USB.7 | length 956.4
  Top Copper w6: USB.5 1705.47,319.25 1712.75,326.53 1712.75,327.85 1724.9,340 1729.95,340 ; v1@1735,610 1729.95,604.95 1729.95,340 ; USB.7 1741.94,306.41 1741.94,333.06 1735,340 1729.95,340 ; v1(1844.18,659.56) v1@1844.37,659.74 ; CP2102.5@1844.37,756.39 v1@1844.37,659.74 ; D1.3 2021.19,480 1898.43,480 1885,493.44 1885,656.49 1881.49,660 1844.63,660 v1@1844.37,659.74
  Bottom Copper w6: v1(1732.49,612.85) 1797.47,612.85 v1(1844.18,659.56)
NetCP2102_9: CP2102.9 R7.1 | length 236.9
  Top Copper w6: CP2102.9 2137.54,820.45 R7.1
NetCP2102_11: CP2102.11 R6.1 | length 253.5
  Top Copper w6: CP2102.11 2117.12,859.85 2155.91,898.64 R6.1
NetCP2102_24: CP2102.24 Q2.2 R4.2 | length 1151.3
  Top Copper w6: Q2.2 1106.85,909.45 1096.07,920.23 1096.07,955.73 1086.57,965.23 1086.57,1026.49 1090.09,1030 1489.49,1030 1493,1033.51 1493,1179.8 R4.2 1531.49,1181.1 1535,1177.59 1535,1000 1645,890 1703.78,890 1714.23,879.55 CP2102.24@1720.33,879.55
NetCP2102_25: CP2102.25 U1.35 | length 2669
  Top Copper w6: U1.35 492,2263.32 545.68,2317 1161,2317 1236.84,2241.16 1236.84,1422.16 1289,1370 1568,1370 1600,1338 1600,1296.51 1603.51,1293 1650,1293 1650,984.73 v1(1673.28,961.45) ; v1(1681.28,826.18) 1714.95,859.85 CP2102.25
  Bottom Copper w6: v1(1673.28,961.45) 1673.28,895.63 1681.28,887.63 v1(1681.28,826.18)
NetCP2102_26: CP2102.26 U1.34 | length 2581.3
  Top Copper w6: U1.34 542,2263.32 573.68,2295 1153,2295 1218,2230 1218,1415 1294,1339 1553,1339 1564,1328 1564,1001 1625,940 1734.57,940 1750.65,923.93 1750.65,852.16 1738.63,840.15 CP2102.26
NetCP2102_28: CP2102.28 Q1.2 R5.2 | length 700
  Top Copper w6: Q1.2 1187.56,1143.7 1232,1099.26 v1(1232,1096) ; v1(1428,1005) 1431.64,1001.36 1431.64,987.18 R5.2@1467,951.81 ; R5.2 1510.52,947 1656.77,800.75 CP2102.28
  Bottom Copper w6: v1(1232,1096) 1337,1096 v1(1428,1005)
NetD1_4: D1.4 SW3.2 USB.2 USB.11 | length 1708.7
  Top Copper w20: SW3.2 1364.53,100 1484.62,100 1496.33,111.72 1496.33,130 ; USB.2 1639.69,304.33 1639.69,325.31 1593.28,371.72 1576.72,371.72 1575,370 1535,370 1496.33,331.33 1496.33,130 ; USB.11 1829.49,378.28 1841.21,390 1988.28,390 2000,378.28 ; D1.4 2014.28,378.28 2000,378.28 ; 1496.33,130 1511.52,130 1523.23,141.72 1523.23,145.5 1547.54,169.8 1922.47,169.8 1935.32,156.95 1951.89,156.95 2000,205.06 2000,378.28
NetLED1_1: LED1.1 R11.1 | length 313.8
  Top Copper w6: LED1.1 595.3,69 513.51,69 510,72.51 510,186.49 513.51,190 604.63,190 R11.1
NetMAX1_1: MAX1.1 MAX2.1 U1.33 | length 2808.4
  Top Copper w6: U1.33 592,2220.01 679.01,2133 v1@688,2133 ; v1@907,2353 1603.21,2353 1660.79,2295.43 2357,2295.43 2397.2,2335.63 MAX2.1 ; 2356.31,2295.43 2356.31,1809.03 2356.46,1808.88 2356.46,1730.76 2367.73,1719.49 MAX1.1
  Bottom Copper w6: v1(683.62,2136.77) 680.49,2133.63 680.49,2090.51 684,2087 890,2087 903.33,2100.33 v1(903.33,2352.56)
NetMAX1_2: MAX1.2 R9.2 | length 325
  Top Copper w6: MAX1.2 2387.42,1719.49 2398.85,1730.92 2434.41,1730.92 2462,1703.32 2462,1535.37 2477.89,1519.48 2477.89,1514.67 2497.19,1495.37 R9.2
NetMAX1_4: MAX1.4 R10.2 | length 251.4
  Top Copper w6: R10.2 2371.74,1607.74 2426.79,1662.79 MAX1.4
NetMAX1_9: MAX1.9 U6.3 | length 543.5
  Top Copper w6: MAX1.9 2426.73,1837.59 2445.1,1855.96 2477.63,1855.96 2503.59,1830 v1(2505,1830) ; v1(2605,1811) 2701.4,1811 U6.3
  Bottom Copper w6: v1(2505,1830) 2510.14,1830 2524.14,1844 2572,1844 v1(2605,1811)
NetMAX1_10: MAX1.10 U6.1 | length 433.4
  Top Copper w6: MAX1.10 2407.04,1837.59 2449.45,1880 v1(2505,1880) ; v1(2610,1857) 2647.4,1857 U6.1
  Bottom Copper w6: v1(2505,1880) 2528,1857 v1(2610,1857)
NetMAX1_14: MAX1.14 MAX2.14 U1.10 | length 3193.9
  Top Copper w6: U1.10 806.72,1547.72 806.72,1572.72 838,1604 1077,1604 v1(1143,1538) ; v1@1655.62,2346.38 2295.62,2346.38 ; v1(2270,2323) 2272.25,2323 2295.62,2346.38 ; v1(2319,2128) 2319,2122.99 2311,2114.99 2311,1801.84 2331.26,1781.57 MAX1.14 ; MAX2.14 2366.66,2410.52 2335.53,2410.52 2308.07,2383.06 2308.07,2358.82 2295.62,2346.38
  Bottom Copper w6: v1(1143,1538) 1143,2106 1082,2167 1082,2335.49 1091.99,2345.47 v1(1651.2,2345.47) ; v1(2270,2323) 2270,2317.99 2262,2309.99 2262,2185 v1(2319,2128)
NetMAX1_16: MAX1.16 MAX2.16 U1.11 | length 3428.2
  Top Copper w6: U1.11 842,1511.35 884.35,1469 v1(1105.1,1469) ; v1(2309,2175) 2309,2149.93 2237,2077.93 2237,1646.51 2240.51,1643 2296.5,1643 2317.25,1663.75 ; v1(2309,2319) 2356.5,2366.51 2356.5,2367.88 2360.74,2372.12 MAX2.16 ; v1@2336,1645 2317.25,1663.75 ; MAX1.16 2320.76,1742.2 2317.25,1738.69 2317.25,1663.75
  Bottom Copper w6: v1(1105.1,1469) 1231,1469 1275.51,1513.51 1280.49,1513.51 1287,1507 1287,1123.51 1290.51,1120 2275,1120 2323.03,1168.03 2323.03,1626.74 2337.21,1640.92 v1(2337.21,1642.97) ; v1(2309,2175) 2309,2180.14 2304.97,2184.17 2304.97,2305.99 2305.36,2306.38 2305.36,2315.37 v1(2309,2319)
NetMAX2_2: MAX2.2 R8.2 | length 252.5
  Top Copper w6: R8.2 2417.81,2194 2467.69,2243.87 2467.69,2357.02 2463.88,2360.83 2428.32,2360.83 2416.89,2349.41 MAX2.2
NetMAX2_9: MAX2.9 U6.2 | length 554.5
  Top Copper w6: MAX2.9 2520.38,2460.62 2759.91,2221.09 U6.2
NetMAX2_10: MAX2.10 U6.4 | length 662.4
  Top Copper w6: MAX2.10 2436.51,2467.51 2447.94,2478.93 2549.07,2478.93 2859.91,2168.09 U6.4
NetQ1_1: Q1.1 R4.1 | length 254.5
  Top Copper w6: Q1.1 1380.36,1218.5 1412.95,1185.91 R4.1
NetQ1_3: Q1.3 U1.25 | length 1361.7
  Top Copper w6: U1.25 992,2242.28 1006.72,2257 1116.49,2257 1123,2250.49 v1(1123,2193) ; Q1.3 1260.57,1176 v1(1319,1176)
  Bottom Copper w6: v1(1123,2193) 1319,1997 v1(1319,1176)
NetQ2_1: Q2.1 R5.1 | length 332.3
  Top Copper w6: Q2.1 1118.52,985.09 1118.52,1013.52 1125,1020 1194.36,1020 1267.36,947 R5.1
NetR1_1: R1.1 USB.10 | length 160.6
  Top Copper w6: USB.10 1803.9,376.03 1835,407.13 R1.1
NetR2_1: R2.1 USB.4 | length 193.8
  Top Copper w6: R2.1 1608.38,416.62 1659.02,416.62 1685.79,389.84 USB.4
pads on no net: CP2102.1 CP2102.2 CP2102.10 CP2102.12 CP2102.13 CP2102.14 CP2102.15 CP2102.16 CP2102.17 CP2102.18 CP2102.19 CP2102.20 CP2102.21 CP2102.22 CP2102.23 CP2102.27 MAX1.5 MAX1.6 MAX1.12 MAX1.13 MAX2.5 MAX2.6 MAX2.12 MAX2.13 U1.4 U1.5 U1.6 U1.7 U1.8 U1.9 U1.12 U1.13 U1.14 U1.16 U1.17 U1.18 U1.19 U1.20 U1.21 U1.22 U1.23 U1.24 U1.26 U1.27 U1.29 U1.31 U1.32 U1.36 U1.37 USB. USB.3 USB.9

## Polygon pours and split planes (outlines as drawn)
GND on Signal Layer 2 "GND_L03_P009" (solid, pour order 9): 260,2950 2960,2950 2960,10 2950,0 260,0
GND on Signal Layer 1 "GND_L02_P008" (solid, pour order 8): 260,10 2940,10 2950,0 2950,2950 260,2950

## Text inside footprints (layer, text, board x,y; h text height)
SW3: Mechanical 15 "1" at 1211.58,189.85 h20 r270
SW4: Mechanical 15 "1" at 423,337.1 h20 r180